# Altium PCB STL_PCB.PcbDoc
Units mm, origin at the board's own origin, x right, y up, seen from the top; angles counter-clockwise.
Board outline 29.97 x 70 mm, 2 copper layers (Top Layer, Bottom Layer); 43 components, 34 nets, 146 pads, 78 vias.
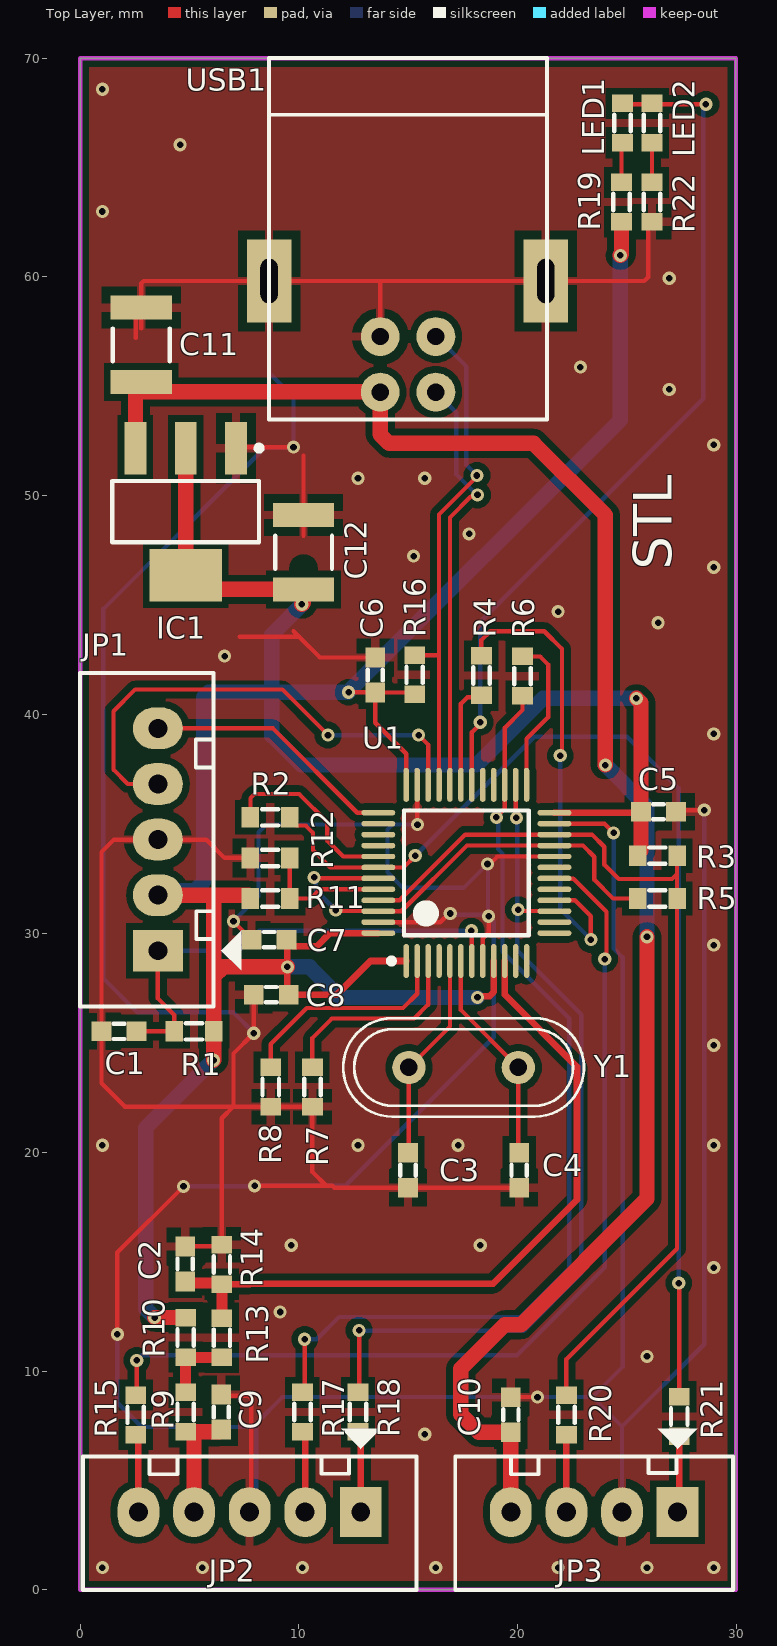
[diagram p0: Top Layer view]
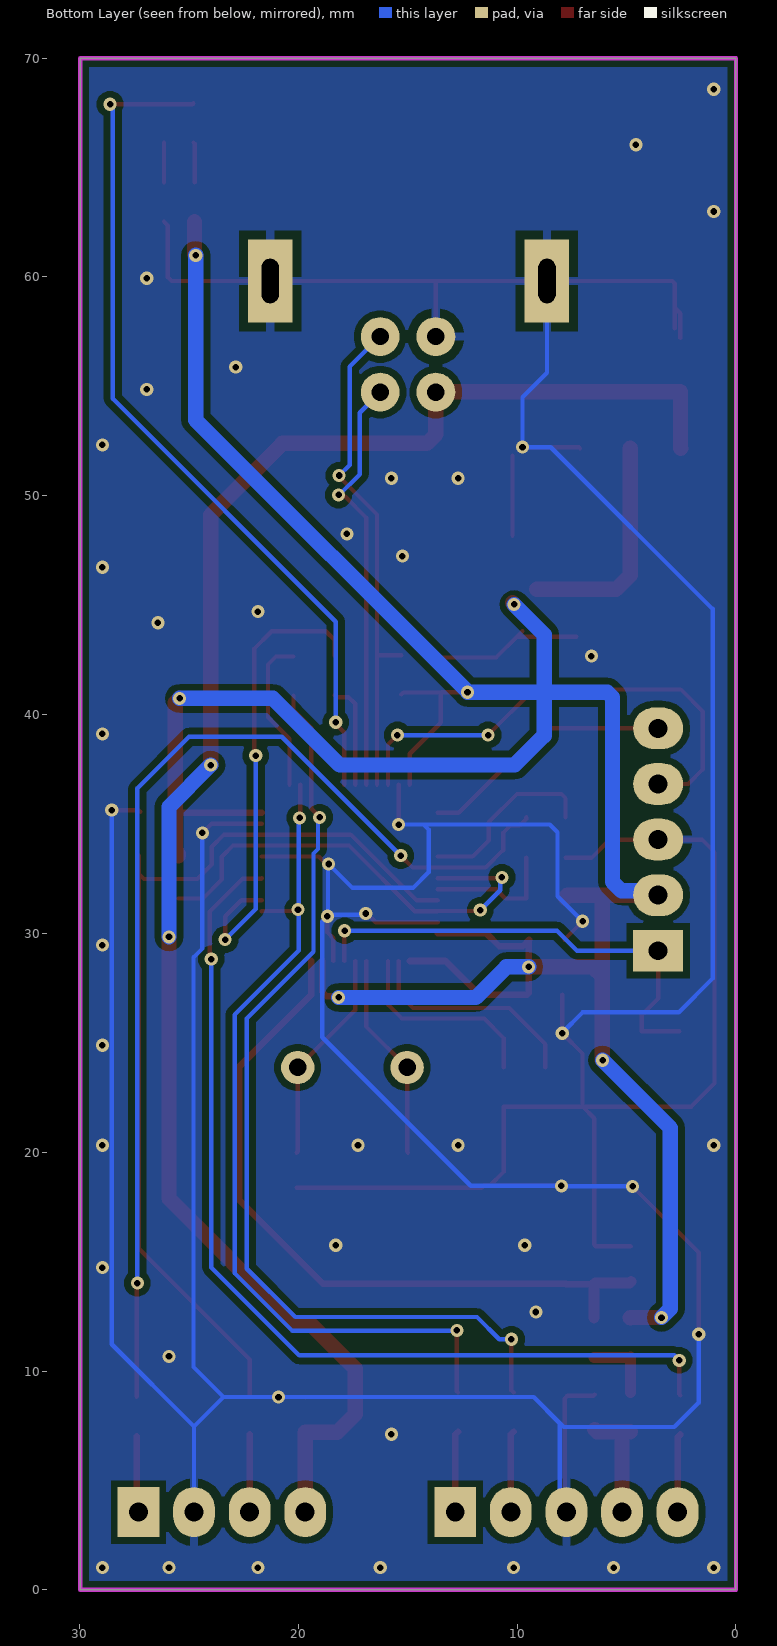
[diagram p1: Bottom Layer view, seen from below]
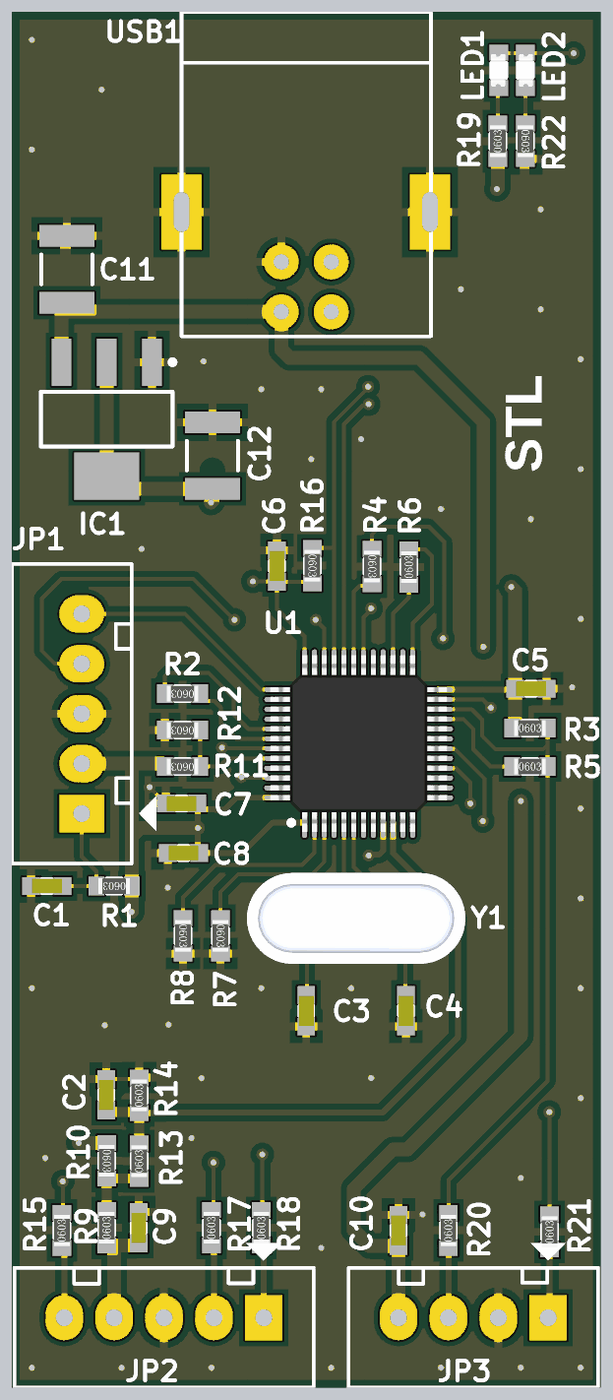
[diagram p2: 3D render of the assembled board from above, using the file's embedded part models]

## Layer stack, top to bottom
Top Solder: solder mask 0.0102, Solder Resist, Dk 3.5
Top Layer: signal copper 0.0356
Dielectric 1: dielectric 0.32, FR-4, Dk 4.8
Bottom Layer: signal copper 0.0356
Bottom Solder: solder mask 0.0102, Solder Resist, Dk 3.5

## Board outline
0,0 0,70 29.972,70 29.972,0

## Design rules (kind name [scope] priority, off if disabled: settings)
Clearance [All] p1: gap=0.2 ignorepadtopadclearanceinfootprint=FALSE except(0.3: Arc-Fill Arc-Poly Arc-Region Track-Fill Track-Poly Track-Region SMDPad-Fill SMDPad-Poly SMDPad-Region THPad-Fill THPad-Poly THPad-Region Via-Fill Via-Poly Via-Region Fill-Fill Fill-Poly Fill-Region Poly-Poly Poly-Region Region-Region)
ComponentClearance [All] p1 off: gap=0.254 collisioncheckmode=3 verticalgap=0.254 showdistances=FALSE
Height [All] p1 off: minheight=0 maxheight=25.4 prefheight=12.7
HoleSize [All] p1 off: absolutevalues=TRUE maxlimit=2.54 minlimit=0.025 maxpercent=80.000 minpercent=20.000
HoleToHoleClearance [All] p1 off: gap=0.254 allowstackedmicrovias=TRUE
LayerPairs [All] p1 off: enforce=TRUE
MinimumSolderMaskSliver [All] p1 off: minsoldermaskwidth=0.254
NetAntennae [All] p1 off: netantennaetolerance=0
PolygonConnect [All] p1: thpad.connectstyle=Relief thpad.reliefconductorwidth=0.4 thpad.reliefentries=4 thpad.polygonreliefangle="90 Angle" thpad.airgapwidth=0.4 smdpad.connectstyle=Relief smdpad.reliefconductorwidth=0.4 smdpad.reliefentries=4 smdpad.polygonreliefangle="90 Angle" smdpad.airgapwidth=0.4 via.connectstyle=Direct via.reliefconductorwidth=0.4 via.reliefentries=4 via.polygonreliefangle="90 Angle" via.airgapwidth=0.4
RoutingVias [All] p1: holewidth=0.3 width=0.6 viastyle="Through Hole" minholewidth=0.3 minwidth=0.6 maxholewidth=0.5 maxwidth=1
SilkToSilkClearance [All] p1 off: silktosilkclearance=0.254
SilkToSolderMaskClearance [IsPad] p1 off: minsilkscreentomaskgap=0.254 clearancetoexposedcopper=TRUE
SolderMaskExpansion [All] p1: expansion=0.102 istentingtop=FALSE
Width [All] p1: maxlimit=0.7 minlimit=0.2 preferedwidth=0.2
21 further rules are at their usual default settings.

## Components (designator, comment, footprint, x,y, rotation, side; value= is the part's Value field where it differs from the comment)
C1 "0.1uF" C0603 1.778,25.527 r0 top value=33pF
C2 "0.1uF" C0603 4.801,14.897 r270 top
C3 "0.1uF" C0603 14.986,19.177 r90 top value=22pF
C4 "0.1uF" C0603 20.066,19.177 r90 top value=22pF
C5 "0.1uF" C0603 26.43,35.56 r180 top
C6 "0.1uF" C0603 13.487,41.808 r270 top
C7 "0.1uF" C0603 8.637,29.718 r0 top
C8 "0.1uF" C0603 8.738,27.203 r0 top
C9 "0.1uF" C0603 6.452,8.128 r270 top
C10 "0.1uF" C0603 19.685,8.001 r270 top
C11 "10uF" C1812 2.794,56.896 r90 top value=10uF/50V
C12 "10uF" C1812 10.211,47.422 r90 top value=10uF/50V
IC1 "LM1117-5V" SOT223-4N 4.826,49.276 r270 top value=LM317
JP1 "JP5" CON5 3.556,29.21 r90 top value="Connector 5"
JP2 "JP5" CON5 12.827,3.556 r180 top value="Connector 5"
JP3 "JP4" CON4 27.305,3.556 r180 top value="Connector 4"
LED1 "LED GREEN" LED0603 24.79,67.031 r90 top value="LED 3 ly Single Colour"
LED2 "LED RED" LED0603 26.137,67.031 r270 top value="LED 3 ly Single Colour"
R1 "10k" R0603 5.207,25.527 r180 top value="R1/4W - 1K"
R2 "220" R0603 8.687,35.306 r180 top value="R1/4W - 1K"
R3 "680" R0603 26.38,33.553 r0 top value="R1/4W - 1K"
R4 "220" R0603 18.339,41.783 r270 top value="R1/4W - 1K"
R5 "220" R0603 26.38,31.598 r0 top value="R1/4W - 1K"
R6 "220" R0603 20.218,41.758 r90 top value="R1/4W - 1K"
R7 "NA" R0603 10.617,22.987 r270 top value="R1/4W - 1K"
R8 "10k" R0603 8.712,22.987 r270 top value="R1/4W - 1K"
R9 "0" R0603 4.826,8.128 r90 top value="R1/4W - 1K"
R10 "0" R0603 4.826,11.537 r270 top value="R1/4W - 1K"
R11 "10k/NC" R0603 8.687,31.597 r180 top value="R1/4W - 1K"
R12 "10k" R0603 8.687,33.452 r180 top value="R1/4W - 1K"
R13 "100k" R0603 6.477,11.524 r90 top value="R1/4W - 1K"
R14 "100k" R0603 6.477,14.87 r90 top value="R1/4W - 1K"
R15 "75" R0603 2.54,8.001 r90 top value="R1/4W - 1K"
R16 "4.7k" R0603 15.291,41.819 r270 top value="R1/4W - 1K"
R17 "75" R0603 10.16,8.128 r90 top value="R1/4W - 1K"
R18 "75" R0603 12.7,8.128 r90 top value="R1/4W - 1K"
R19 "100" R0603 24.74,63.424 r90 top value="R1/4W - 1K"
R20 "75" R0603 22.225,8.001 r90 top value="R1/4W - 1K"
R21 "75" R0603 27.381,7.925 r90 top value="R1/4W - 1K"
R22 "100" R0603 26.137,63.424 r270 top value="R1/4W - 1K"
U1 "STM32F103C8T6" LQFP48_L 17.653,32.766 r90 top
USB1 "USB-S" USB-S 13.716,54.737 r0 top value=USB
Y1 "8Mhz" XTA 17.526,23.876 r0 top

## Footprints (in the part's own frame and the unit in brackets; to place one, negate y for a bottom-side part, rotate by r counter-clockwise, add the part's x,y. Pads: shape width x height; smd on the part's side, far side on the other; paste and mask are expansions set on the pad)
C0603 [mm] "Chip Capacitor, 2-Leads, Body 1.6x0.8mm, IPC Medium Density"
  rect 0.9x0.9 smd: 1(-0.8,0) 2(0.8,0)
  silkscreen extent -0.25,-0.35 0.25,0.35, body extent -0.76,-0.38 0.76,0.38, height 0.69
C1812 [mm] "Chip Inductor, 2-Leads, Body 3.2x2.5mm, IPC Medium Density"
  rect 1.1x2.8 smd: 1(-1.7,0) 2(1.7,0)
  silkscreen extent -0.75,-1.3 0.75,1.3, body extent -1.8,-1.4 1.8,1.4, height 1.2
CON4 [mil] "CON4"
  rect 75x90 hole 34: 1(0,0)
  oval 75x90 hole 34: 2(100,0) 3(200,0) 4(300,0)
  silkscreen extent -100,-150 400,140
CON5 [mil] "CON5"
  rect 75x90 hole 34: 1(0,0)
  oval 75x90 hole 34: 2(100,0) 3(200,0) 4(300,0) 5(400,0)
  silkscreen extent -100,-150 500,140
LED0603 [mm] "Chip Resistor, 2-Leads, Body 1.6x0.8mm, IPC Medium Density"
  rect 0.8x0.95 smd: 1(-0.9,0) 2(0.9,0)
  silkscreen extent -0.38,-0.38 0.37,0.38, body extent -0.83,-0.33 0.83,0.39, height 0.68
LQFP48_L [mm] "Thin QFP, 48-Leads, Body 7x7mm, Pitch 0.5mm, IPC High Density"
  oval 1.55x0.25 smd: 1(-4.025,2.75) 2(-4.025,2.25) 3(-4.025,1.75) 4(-4.025,1.25) 5(-4.025,0.75) 6(-4.025,0.25) 7(-4.025,-0.25) 8(-4.025,-0.75) 9(-4.025,-1.25) 10(-4.025,-1.75) 11(-4.025,-2.25) 12(-4.025,-2.75) 25(4.025,-2.75) 26(4.025,-2.25) 27(4.025,-1.75) 28(4.025,-1.25) 29(4.025,-0.75) 30(4.025,-0.25) 31(4.025,0.25) 32(4.025,0.75) 33(4.025,1.25) 34(4.025,1.75) 35(4.025,2.25) 36(4.025,2.75)
  oval 0.25x1.55 smd: 13(-2.75,-4.025) 14(-2.25,-4.025) 15(-1.75,-4.025) 16(-1.25,-4.025) 17(-0.75,-4.025) 18(-0.25,-4.025) 19(0.25,-4.025) 20(0.75,-4.025) 21(1.25,-4.025) 22(1.75,-4.025) 23(2.25,-4.025) 24(2.75,-4.025) 37(2.75,4.025) 38(2.25,4.025) 39(1.75,4.025) 40(1.25,4.025) 41(0.75,4.025) 42(0.25,4.025) 43(-0.25,4.025) 44(-0.75,4.025) 45(-1.25,4.025) 46(-1.75,4.025) 47(-2.25,4.025) 48(-2.75,4.025)
  silkscreen extent -4.15,-2.85 2.85,3.55, body extent -4.5,-4.5 4.5,4.5, height 1.5
R0603 [mm] "Chip Resistor, 2-Leads, Body 1.6x0.8mm, IPC Medium Density"
  rect 0.8x0.95 smd: 1(-0.9,0) 2(0.9,0)
  silkscreen extent -0.38,-0.38 0.37,0.38, body extent -0.8,-0.4 0.8,0.4, height 0.45
SOT223-4N [mm] "SOT223, 4-Leads, Body 6.5x3.5mm, Pitch 2.3mm, Lead Span 7mm, IPC Medium Density"
  rect 2.4x1 smd: 1(-2.9,2.3) 2(-2.9,0) 3(-2.9,-2.3)
  rect 2.4x3.3 smd: 4(2.9,0)
  silkscreen extent -3.02,-3.35 1.4,3.48
USB-S [mil] "USB B connector, 4pin, For Print"
  round 70 hole 31: 1(0,0) 2(100,0) 3(100,100) 4(0,100)
  rect 80x150 hole 31 slot 80 at 90 deg: 5(-200,200) 6(298,200)
  silkscreen extent -200,-49 300,601
XTA [mm]
  round 1.524 hole 0.8: 1(-2.5,0) 2(2.5,0)
  silkscreen extent -5.5,-2.25 5.5,2.25, body extent -5.5,-2.25 5.5,2.25, height 3.8

## Part data
C1: library part CAP, "Cremic For Xtal 1pF => 100pF"
C2 C3 C4 C5 C6 C7 C8 C9 C10: library part "Cap Semi", "Capacitor (Semiconductor SIM Model)", LatestRevisionDate=29-May-2009, LatestRevisionNote="IPC-7351 Footprint Added.", PackageDescription="Chip Capacitor", PackageReference=C1206, Published=8-Jun-2000, Publisher="Altium Limited"
C11 C12: library part CP1, "Cap P  0,1uF < 22uF , 16 - 50V", Description 1="10 => 220uF/6,3V/10V - 10uF => 100uF/16V", Description 2="0,1uF => 33uF/50V - 10uF => 22uF/63V", Description 3="0,47uF => 10uF/100V"
IC1: library part LM1117, "3v3"
JP1 JP2: library part Con5, "Connector 5"
JP3: library part Con4, "Connector 4"
LED1 LED2: library part LED, "LED Single colour Green and Red"
R1 R2 R3 R4 R5 R6 R7 R8 R9 R10 R11 R12 R13 R14 R15 R16 R17 R18 R19 R20 R21 R22: library part R, "Resistor 1/4W"
U1: "STM32 ARM-based 32-bit MCU with 64 Kbytes Flash, 48-pin LQFP, Industrial Temperature", ComponentLink1Description="Manufacturer Link", ComponentLink1URL=www.st.com/stm32, ComponentLink2Description=Datasheet, ComponentLink2URL=http://www.st.com/stonline/products/literature/ds/13587.pdf, DatasheetVersion="rev6, Mar-2008", PackageDescription="48-Pin Low-Profile Quad Flat Pack, 7 x 7 mm Body, 0.5 mm Pitch (LQFP48)", PackageReference=LQFP48, PackageVersion=Mar-2008, Published=30-May-2008, Publisher="Altium Limited"
USB1: library part USB_S, "USB connector"
Y1: library part XTAL, "Crystal Oscillator", LatestRevisionDate=17-Jul-2002, LatestRevisionNote="Re-released for DXP Platform.", PackageDescription="Crystal, Thru-Hole; 2 Leads; Body 3.1 x 8.2 mm (Dia.xH)", PackageReference=R38, Published=8-Jun-2000, Publisher="Altium Limited"

## Via types
v1: diameter 0.6, hole 0.3, Top Layer to Bottom Layer, tented both sides, 78 vias

## Nets (pads, with @x,y where several pads share a name; then routed paths per layer and width w, separated by ;. In a path a pad name is that pad's centre, name@x,y a point inside that pad or via, vN(x,y) a via of type N, cw(c..) or ccw(c..) an arc to the next point about the centre after c; other vN are vias at no path point)
+3.3V: C5.2 C6.2 C7.2 C8.2 C12.1 IC1.2 IC1.4 JP1.2 R1.1 R3.1 R10.1 R11.2 R16.2 R19.1 U1.1 U1.9 U1.24 U1.36 U1.48 | length 153.5
  Top Layer w0.2: v1(12.268,41.021) 13.475,41.021 C6.2 ; U1.36 14.903,38.208 13.487,39.624 C6.2 ; R16.2 15.202,41.008 C6.2
  Top Layer w0.3: C7.2 C7.2@9.474,29.681 ; U1.48 11.423,30.016 10.82,29.413 10.342,29.413 10.337,29.418 9.737,29.418 C7.2@9.474,29.681 ; U1.1 13.272,28.741 11.735,27.203 C8.2 9.474,27.267 v1(9.474,28.473) C7.2@9.474,29.681 ; v1(18.161,27.076) 18.218,27.134 18.708,27.134 18.903,27.328 U1.9 ; U1.24 25.586,35.516 C5.2
  Top Layer w0.7: v1(3.404,12.446) 4.817,12.446 R10.1 ; JP1.2 6.071,31.75 ; IC1.2 IC1.4 5.48,45.722 C12.1@9.104,45.722 ; v1(6.096,24.206) 6.107,24.217 R1.1 6.107,28.027 ; R11.2 7.787,31.672 7.709,31.75 6.071,31.75 ; v1(9.474,28.473) 6.553,28.473 6.107,28.027 ; v1(10.135,45.034) v1@10.211,45.11 ; v1(24.689,60.985) 24.74,61.036 R19.1 ; v1(25.425,40.742) 25.63,40.537 C5.2 25.63,33.778 25.48,33.628 R3.1 ; 6.071,31.75 6.107,31.714 6.107,28.027
  Bottom Layer w0.7: v1(3.404,12.446) 2.997,12.852 2.997,21.107 v1(6.096,24.206) ; JP1.2 3.756,31.95 5.229,31.95 5.639,32.36 5.639,40.792 5.867,41.021 8.763,41.021 ; v1(9.474,28.473) 10.49,28.473 11.887,27.076 v1(18.161,27.076) ; v1(10.135,45.034) 8.763,43.663 8.763,41.021 ; v1(24.689,60.985) 24.689,53.467 12.268,41.046 v1(12.268,41.021) 8.763,41.021 ; v1(25.425,40.742) 21.158,40.742 18.11,37.694 10.109,37.694 8.763,39.04 8.763,41.021
+3.3VEXT: C9.2 JP2.4 R9.1 | length 5
  Top Layer w0.7: R9.1 6.352,7.228 C9.2 ; JP2.4 R9.1@5.207,6.922
+5V: C10.2 C11.1 IC1.3 JP3.4 USB1.1 | length 79.6
  Top Layer w0.7: IC1.3 2.533,52.183 2.533,53.811 2.533,54.754 2.54,54.761 2.552,54.749 13.704,54.749 USB1.1 13.716,52.81 14.126,52.4 20.726,52.4 24.003,49.124 v1(24.003,37.694) ; JP3.4 C10.2 18.224,7.201 17.399,8.026 17.399,10.109 19.406,12.116 20.142,12.116 25.908,17.882 v1(25.908,29.845)
  Bottom Layer w0.7: v1(24.003,37.694) 25.908,35.789 v1(25.908,29.845)
D+: R16.1 U1.33 USB1.3 | length 23.1
  Top Layer w0.2: R16.1 16.403,42.719 ; U1.33 16.403,42.719 ; v1(18.136,50.927) 18.136,50.876 16.403,49.144 16.403,42.719
  Bottom Layer w0.2: USB1.3 16.281,57.277 17.653,55.905 17.653,51.41 v1(18.136,50.927)
D-: U1.32 USB1.2 | length 19.4
  Top Layer w0.2: U1.32 16.903,49.009 17.856,49.962 18.085,49.962 v1(18.161,50.038)
  Bottom Layer w0.2: USB1.2 17.196,53.797 17.196,50.978 18.136,50.038 v1(18.161,50.038)
GND: C1.1 C2.1 C3.1 C4.1 C5.1 C6.1 C7.1 C8.1 C9.1 C10.1 C11.2 C12.2 IC1.1 JP1.3 JP2.3 JP3.2 R7.2 R8.2 R12.2 R14.2 R22.2 U1.8 U1.20 U1.23 U1.35 U1.47 USB1.4 USB1.5 USB1.6 | length 318.1
  Top Layer w0.2: v1(1.702,11.684) 1.702,15.418 v1(4.724,18.44) ; 2.54,57.211 2.54,58.344 2.794,58.598 2.794,57.646 ; C11.2 2.794,59.7 2.911,59.817 13.741,59.817 ; C2.1 6.404,15.697 R14.2 6.477,21.554 7.01,22.087 ; C9.1 6.515,8.865 7.706,8.865 7.823,8.747 7.823,3.632 JP2.3 ; v1(7.01,30.556) 7.01,30.544 C7.1 ; IC1.1 7.172,52.222 v1(9.754,52.222) ; 7.288,43.561 10.008,43.561 ; R12.2 6.604,33.452 5.766,34.29 JP1.3 1.549,34.29 0.978,33.719 C1.1 0.978,23.152 2.043,22.087 7.01,22.087 ; C8.1 v1(7.938,25.438) 7.01,24.511 7.01,22.087 ; v1(7.976,18.466) 11.251,18.466 ; 9.754,43.815 10.008,43.561 ; 10.211,48.172 10.211,51.841 ; C6.1 10.96,42.608 10.008,43.561 ; U1.47 16.464,30.516 16.859,30.912 v1(16.916,30.912) ; USB1.4 13.716,59.792 13.741,59.817 ; U1.35 15.41,36.784 15.41,34.983 v1(15.418,34.976) ; U1.8 18.403,29.782 18.669,30.048 v1(18.669,30.785) ; v1(18.618,33.172) 18.726,33.172 19.07,33.516 U1.20 ; C10.1 19.698,8.814 v1(20.904,8.814) ; C4.1 C3.1 11.621,18.377 11.532,18.466 11.251,18.466 ; U1.23 23.963,35.016 v1(24.384,34.595) ; R22.2 25.959,62.346 25.959,59.995 25.781,59.817 USB1.6 13.741,59.817 ; C5.1 27.306,35.636 v1(28.524,35.636) ; 7.01,22.087 R8.2 R7.2 10.617,19.099 11.251,18.466
  Bottom Layer w0.2: v1(1.702,11.684) 1.702,8.56 2.819,7.442 7.874,7.442 8.052,7.62 ; v1(4.724,18.44) 4.737,18.453 7.963,18.453 v1(7.976,18.466) 12.116,18.466 18.904,25.254 18.904,30.55 v1(18.669,30.785) v1@18.644,30.81 ; v1(7.01,30.556) 8.153,31.699 8.153,34.62 8.509,34.976 14.275,34.976 ; JP2.3 8.052,3.861 8.052,7.62 ; v1(7.938,25.438) 7.938,25.463 7.01,26.391 2.616,26.391 1.067,27.94 1.067,44.831 8.458,52.222 v1(9.754,52.222) 9.754,54.508 8.636,55.626 USB1.5 ; v1(15.418,34.976) 14.275,34.976 ; v1(16.916,30.912) 16.98,30.848 18.605,30.848 v1@18.644,30.81 ; v1(24.384,34.595) 24.384,29.312 24.79,28.905 24.79,10.185 23.419,8.814 ; JP3.2 24.765,7.468 ; v1(28.524,35.636) 28.524,11.227 24.765,7.468 ; 8.052,7.62 9.246,8.814 v1(20.904,8.814) 23.419,8.814 ; 14.275,34.976 14.046,34.747 14.046,32.791 14.757,32.08 17.526,32.08 v1(18.618,33.172) 18.644,33.147 v1@18.644,30.81 ; 23.419,8.814 24.765,7.468
  other v1: 1.016,1.016 5.588,1.016 10.16,1.016 16.256,1.016 21.844,1.016 25.908,1.016 28.956,1.016 15.748,7.112 25.908,10.668 9.144,12.7 28.956,14.732 9.652,15.748 18.288,15.748 1.016,20.32 12.7,20.32 17.272,20.32 28.956,20.32 28.956,24.892 28.956,29.464 28.956,39.116 6.604,42.672 26.416,44.196 21.844,44.704 28.956,46.736 15.24,47.244 17.78,48.26 12.7,50.8 15.748,50.8 28.956,52.324 26.924,54.864 22.86,55.88 26.924,59.944 1.016,62.992 4.572,66.04 1.016,68.58
LED: LED1.2 LED2.1 U1.30 | length 39.4
  Top Layer w0.2: U1.30 17.903,39.186 18.288,39.571 v1(18.288,39.649) ; LED1.2 24.827,67.894 v1(28.6,67.894)
  Bottom Layer w0.2: v1(18.288,39.649) 18.288,44.247 28.473,54.432 28.473,67.777 28.591,67.894 v1(28.6,67.894)
NetJP2_1: JP2.1 R18.1 | length 3.7
  Top Layer w0.3: R18.1 12.827,7.101 JP2.1
NetJP2_2: JP2.2 R17.1 | length 3.7
  Top Layer w0.3: R17.1 10.287,7.101 JP2.2
NetJP2_5: JP2.5 R15.1 | length 3.6
  Top Layer w0.3: R15.1 2.667,6.974 JP2.5
NetJP3_1: JP3.1 R21.1 | length 3.5
  Top Layer w0.3: JP3.1 27.381,3.632 R21.1
NetJP3_3: JP3.3 R20.1 | length 3.5
  Top Layer w0.3: JP3.3 R20.1
NetLED1_1: LED1.1 R19.2 | length 1.8
  Top Layer w0.2: R19.2 24.74,66.08 LED1.1
NetLED2_2: LED2.2 R22.1 | length 1.8
  Top Layer w0.2: R22.1 LED2.2
NetR2_2: R2.2 U1.41 | length 8.5
  Top Layer w0.2: R2.2 7.787,36.184 7.976,36.373 10.008,36.373 11.303,35.077 11.303,34.239 12.026,33.516 U1.41
NetR4_1: R4.1 U1.16 | length 21.8
  Top Layer w0.2: R4.1 18.339,43.409 18.745,43.815 21.209,43.815 22.022,43.002 22.022,38.202 v1(21.946,38.125) ; U1.16 22.611,31.516 23.343,30.785 v1(23.343,29.718)
  Bottom Layer w0.2: v1(21.946,38.125) 21.946,31.115 v1(23.343,29.718)
NetR5_1: R5.1 U1.21 U1.43 U1.46 | length 21.5
  Top Layer w0.2: v1(10.693,32.563) 10.731,32.526 13.618,32.526 U1.43 ; v1(11.684,31.064) 11.723,31.026 13.618,31.026 U1.46 14.679,31.016 14.681,31.013 17.684,34.016 U1.21 22.982,34.016 23.495,33.503 23.495,32.461 24.359,31.598 R5.1
  Bottom Layer w0.2: v1(10.693,32.563) 10.77,32.486 10.77,31.978 v1(11.684,31.064)
NetR6_2: R6.2 U1.25 | length 7.2
  Top Layer w0.2: R6.2 21.02,42.658 21.387,42.291 21.387,39.878 20.403,38.894 U1.25
NetR7_1: R7.1 U1.3 | length 9.2
  Top Layer w0.2: R7.1 10.617,25.222 11.506,26.111 15.265,26.111 15.903,26.749 U1.3
NetR8_1: R8.1 U1.2 | length 10.2
  Top Layer w0.2: R8.1 8.712,24.943 10.363,26.594 14.757,26.594 15.403,27.239 U1.2
NetR9_2: R9.2 R10.2 R13.1 | length 3.3
  Top Layer w0.5: R9.2 R10.2 4.833,10.631 6.47,10.631 R13.1
NetR11_1: R11.1 R12.1 U1.44 | length 6.1
  Top Layer w0.2: R12.1 R11.1 10.541,31.597 10.959,32.016 U1.44
NRST: R15.2 U1.18 | length 44.1
  Top Layer w0.2: R15.2 2.591,8.952 v1(2.591,10.49) ; U1.18 21.688,32.506 22.535,32.506 24.054,30.988 24.054,28.905 v1(23.978,28.829)
  Bottom Layer w0.2: v1(2.591,10.49) 2.819,10.719 19.964,10.719 23.978,14.732 v1(23.978,28.829)
PA0: C2.2 R13.2 R14.1 U1.10 | length 33.4
  Top Layer w0.3: R14.1 7.747,13.97 7.772,13.995 18.872,13.995 22.708,17.831 22.708,23.901 19.403,27.206 U1.10
  Top Layer w0.5: C2.2 4.864,14.034 6.413,14.034 R14.1 R13.2
PGC: JP1.5 U1.37 | length 11.7
  Top Layer w0.2: JP1.5 8.814,39.37 12.668,35.516 U1.37
PGD: JP1.4 U1.34 | length 22.6
  Top Layer w0.2: JP1.4 2.181,36.83 1.524,37.487 1.524,40.157 2.515,41.148 9.246,41.148 v1(11.328,39.065) ; v1(15.469,39.065) 15.903,38.631 U1.34
  Bottom Layer w0.2: v1(11.328,39.065) v1(15.469,39.065)
RESET: C1.2 JP1.1 R1.2 U1.7 | length 21.8
  Top Layer w0.2: C1.2 R1.2 4.307,26.275 3.556,27.026 JP1.1 ; v1(17.882,30.124) 17.893,30.113 17.893,28.751 U1.7
  Bottom Layer w0.2: JP1.1 7.264,29.21 8.179,30.124 v1(17.882,30.124)
SWIMM_DATA: R3.2 R5.2 R20.2 U1.22 U1.45 | length 43.1
  Top Layer w0.2: U1.45 14.6,31.516 17.6,34.516 U1.22 23.396,34.516 23.952,33.96 23.952,33.147 24.613,32.487 27.051,32.487 27.28,32.715 ; R20.2 22.225,10.541 27.28,15.596 R5.2 27.28,32.715 ; R3.2 27.28,32.715
SWIMM_RST: R2.1 R21.2 U1.42 | length 50.5
  Top Layer w0.2: R2.1 9.587,35.231 9.887,34.931 10.306,34.931 10.643,34.595 10.643,33.807 11.434,33.016 U1.42 14.779,33.016 v1(15.316,33.553) ; v1(27.356,14.021) 27.381,13.995 R21.2
  Bottom Layer w0.2: v1(15.316,33.553) 20.752,38.989 24.994,38.989 27.356,36.627 v1(27.356,14.021)
TCK_SWCLK: R18.2 U1.15 U1.26 | length 39.4
  Top Layer w0.2: R18.2 12.751,9.079 v1(12.751,11.862) ; U1.26 19.913,36.781 19.913,35.307 v1(19.939,35.281) ; v1(20.015,31.09) 20.079,31.026 21.668,31.026 U1.15
  Bottom Layer w0.2: v1(12.751,11.862) 12.776,11.836 20.269,11.836 22.911,14.478 22.911,26.289 19.977,29.223 19.977,31.09 19.977,35.242 v1(19.939,35.281)
TDO_SWO: R4.2 U1.31 | length 4.8
  Top Layer w0.2: U1.31 17.403,40.492 17.704,40.792 18.248,40.792 R4.2
TMS_SWDIO: R6.1 R17.2 U1.27 | length 43.9
  Top Layer w0.2: R17.2 10.262,9.13 v1(10.262,11.455) ; v1(19.025,35.306) 19.05,35.331 19.05,35.357 19.403,35.71 U1.27 19.403,39.393 20.218,40.208 R6.1
  Bottom Layer w0.2: v1(10.262,11.455) 10.82,11.455 11.836,12.471 20.142,12.471 22.352,14.681 22.352,26.111 19.304,29.159 19.304,33.655 19.101,33.858 19.101,35.23 v1(19.025,35.306)
X1: C3.2 U1.5 Y1.1 | length 9.6
  Top Layer w0.2: C3.2 15.026,20.017 Y1.1 16.903,25.753 U1.5
X2: C4.2 U1.6 Y1.2 | length 9.9
  Top Layer w0.2: U1.6 17.403,26.499 Y1.2 20.026,20.017 C4.2
pads on no net: U1.4 U1.11 U1.12 U1.13 U1.14 U1.17 U1.19 U1.28 U1.29 U1.38 U1.39 U1.40

## Polygon pours and split planes (outlines as drawn)
GND on Bottom Layer "GND_L02_P001" (solid, remove dead copper, pour order 1): 0.102,69.977 29.972,69.977 30.023,69.926 30.023,0.076 29.947,0 0.076,0 -0.025,0.102
GND on Top Layer "GND_L01_P000" (solid, remove dead copper, pour order 0): 0.102,69.977 29.972,69.977 30.023,69.926 30.023,0.076 29.947,0 0.076,0 -0.025,0.102

## Keep-outs
Keep-Out Layer:
  lines w0.2: 0,0 0,70 29.972,70 29.972,50 29.972,0 0,0

## Silkscreen, mask and mechanical layers (free items; w line width, h text height)
Top Overlay:
  text "STL" at 27.61,46.609 h3 r90

## Dimensions
0,0 to 0,70 on Mechanical 1
0,0 to 29.972,0 on Mechanical 1